# Altium PCB FT2232HL_master.PcbDoc
Units mil, origin at the board's own origin, x right, y up, seen from the top; angles counter-clockwise.
Board outline 3600 x 2500 mil, 2 copper layers (Top Layer, Bottom Layer); 55 components, 57 nets, 221 pads, 59 vias.
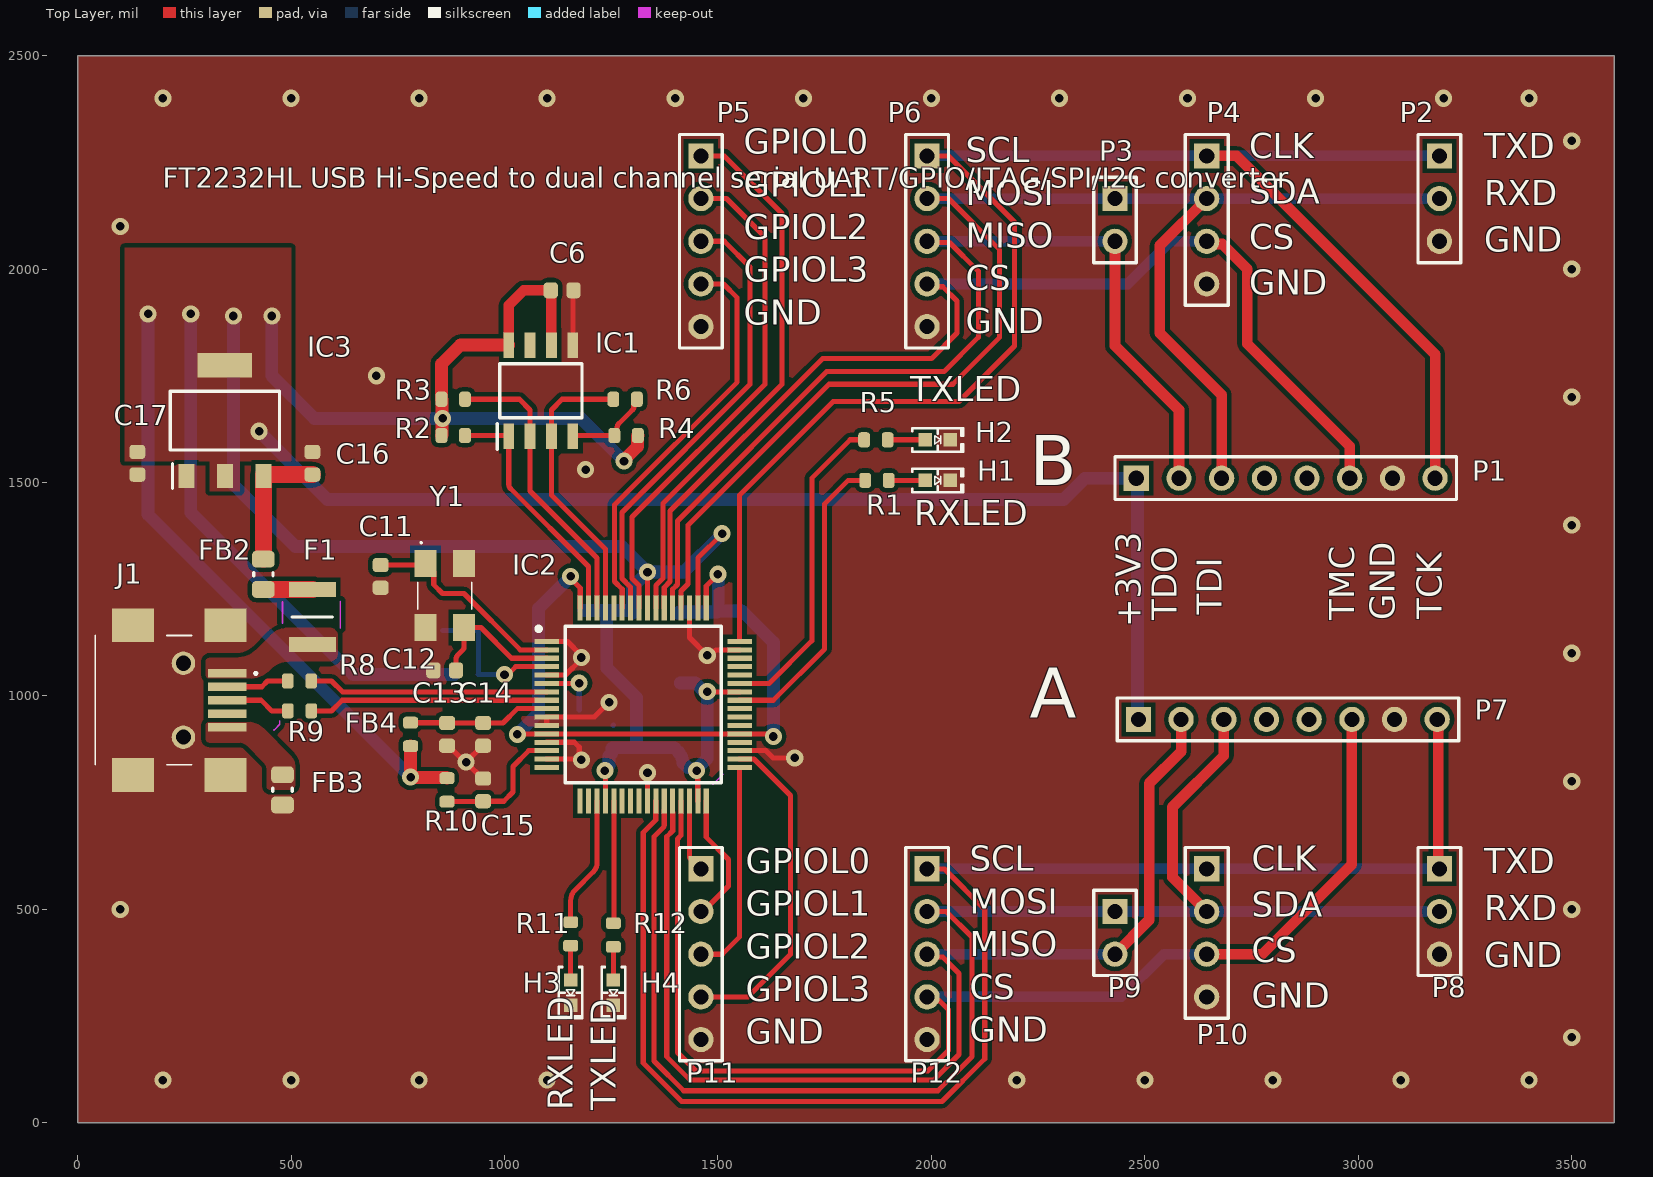
[diagram p0: Top Layer view]
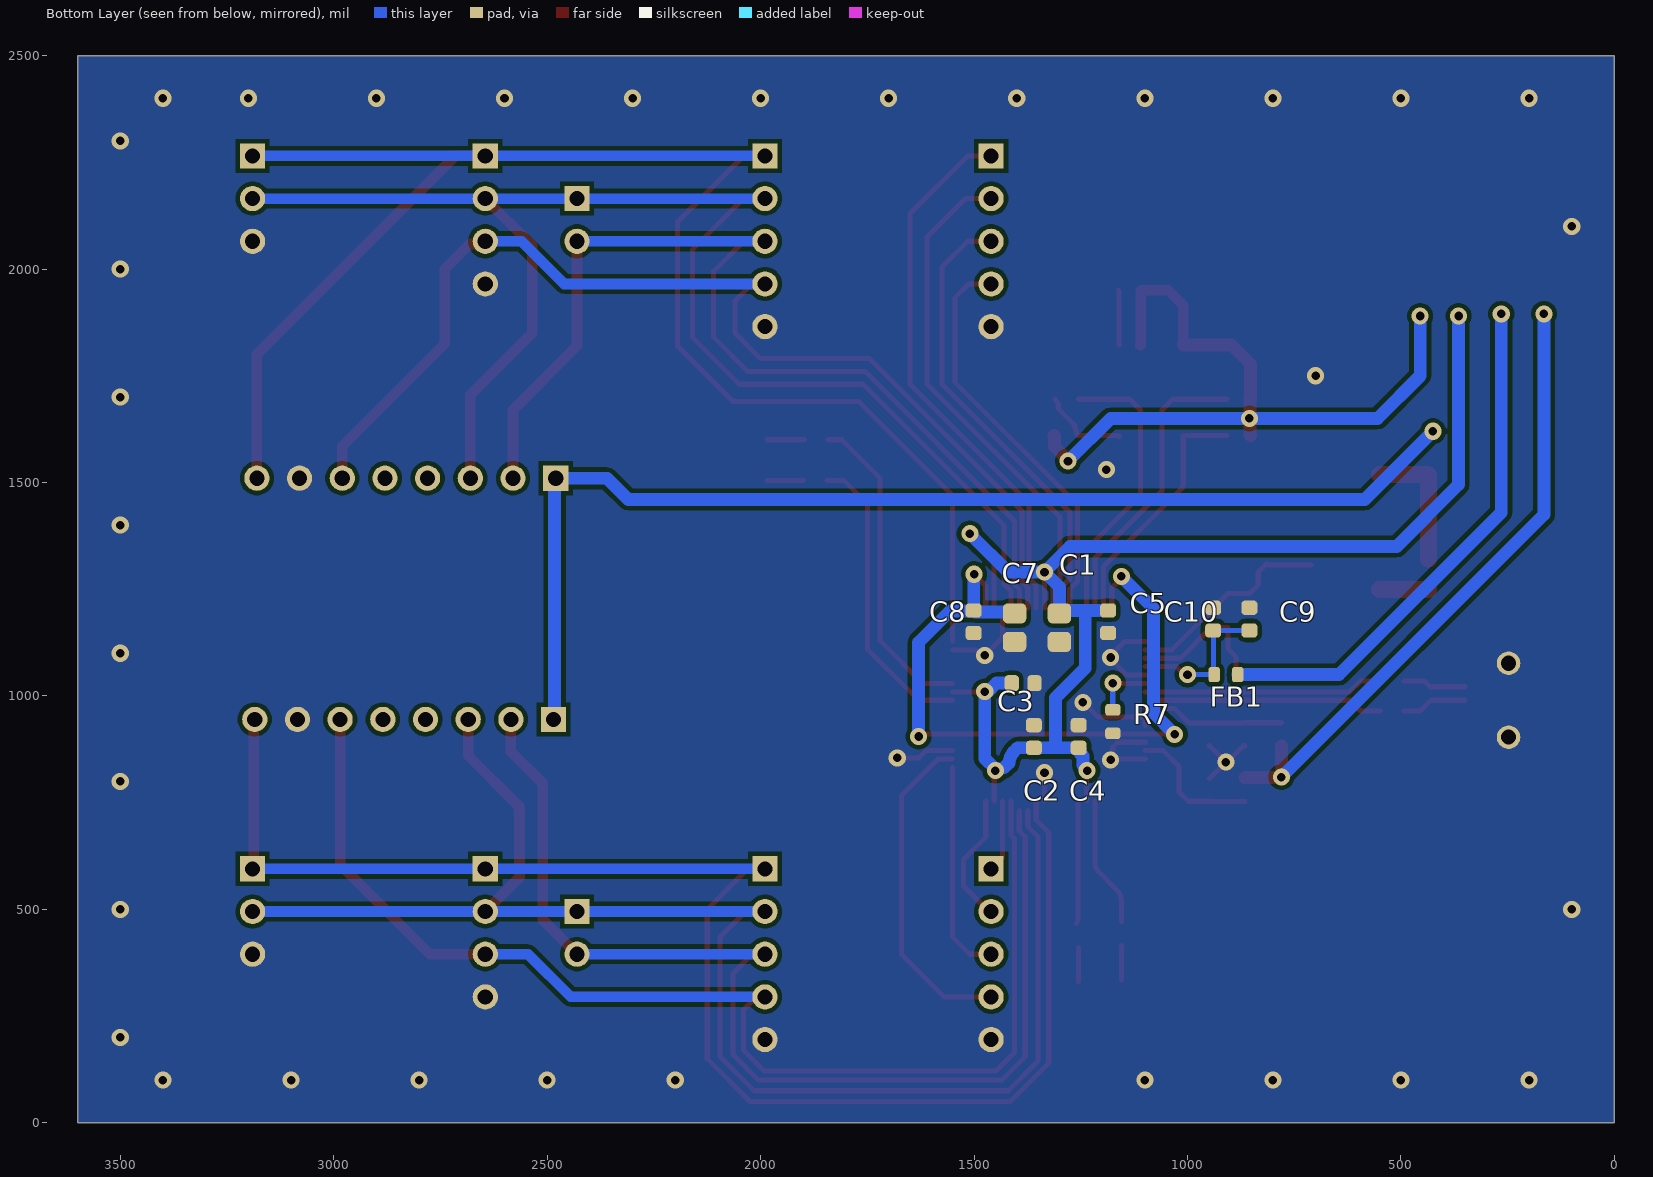
[diagram p1: Bottom Layer view, seen from below]
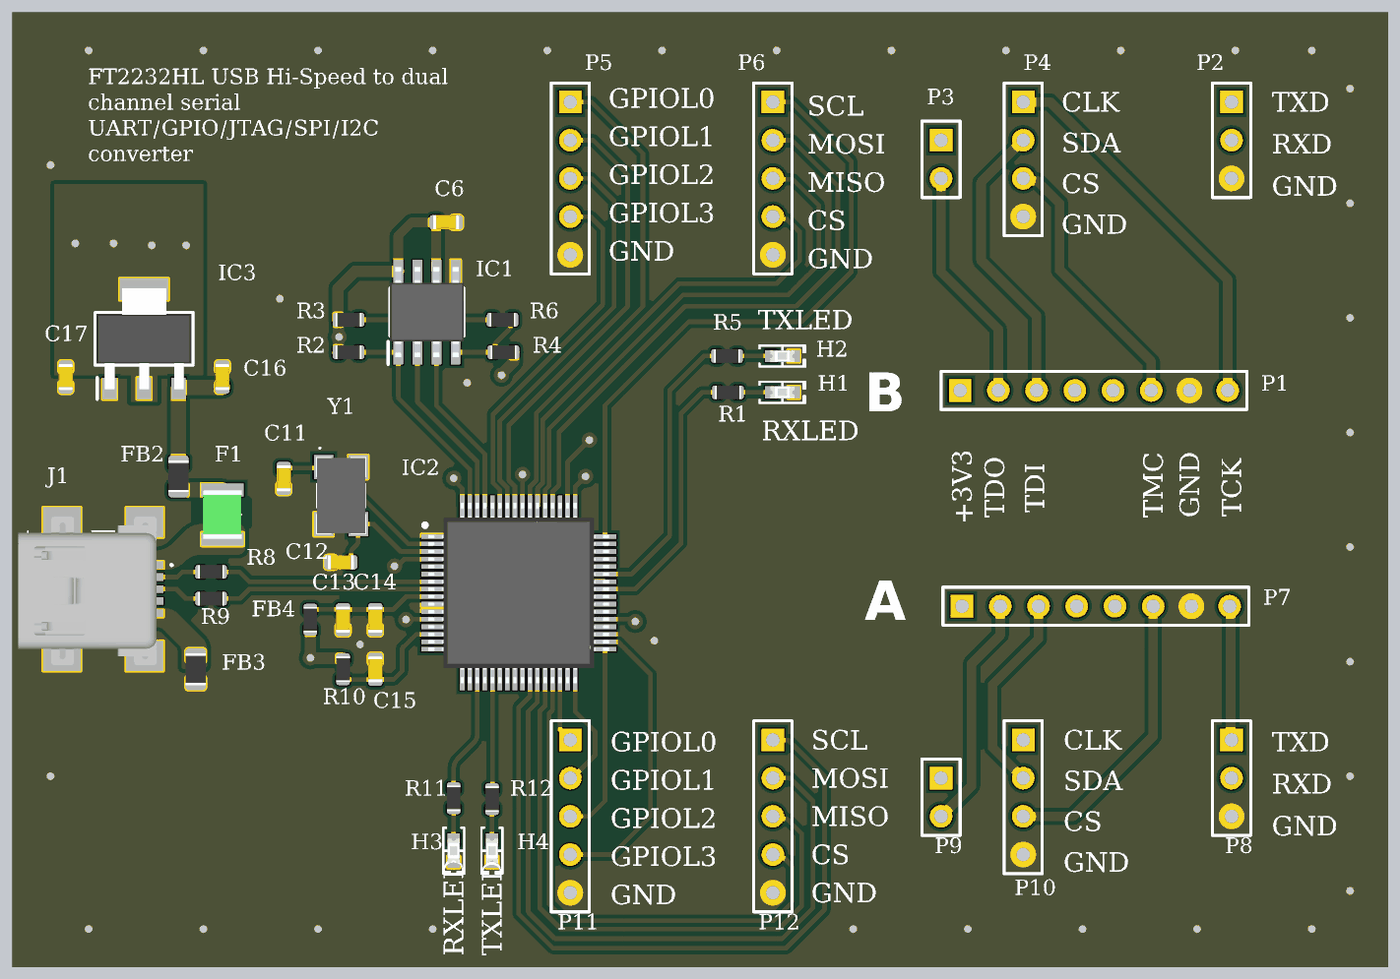
[diagram p2: 3D render of the assembled board from above, using the file's embedded part models]
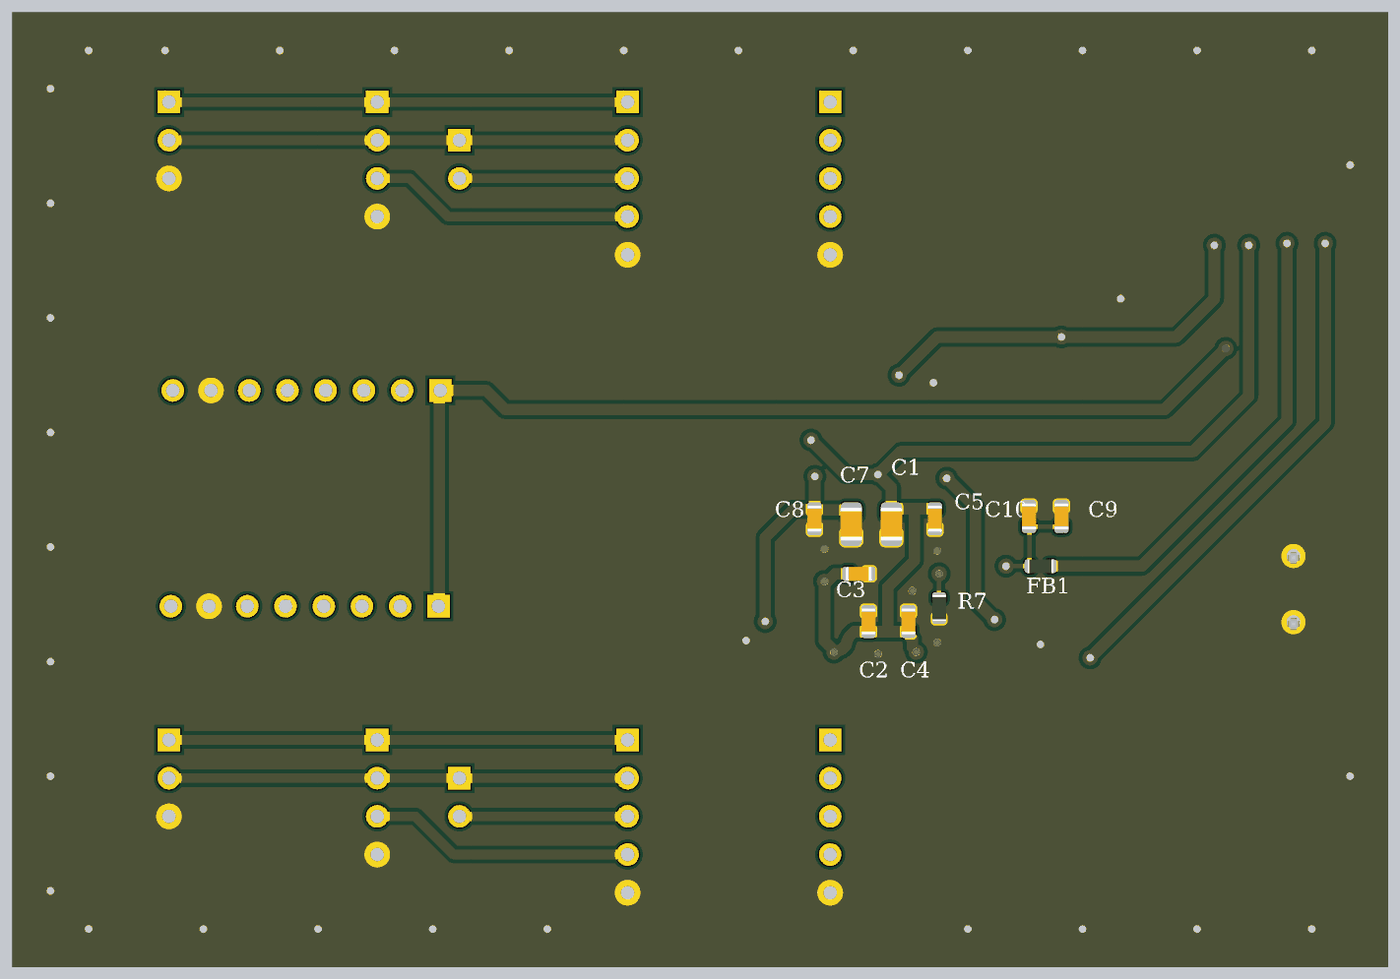
[diagram p3: 3D render of the assembled board from below, using the file's embedded part models]

## Layer stack, top to bottom
Top Solder: solder mask 0.4, Solder Resist, Dk 3.5
Top Layer: signal copper 1.4
Dielectric 1: dielectric 12.6, FR-4, Dk 4.8
Bottom Layer: signal copper 1.4
Bottom Solder: solder mask 0.4, Solder Resist, Dk 3.5

## Board outline
0,0 3600,0 3600,2500 0,2500

## Design rules (kind name [scope] priority, off if disabled: settings)
Clearance [All] p1: gap=10 ignorepadtopadclearanceinfootprint=FALSE except(0: Arc-Hole Track-Hole SMDPad-Hole THPad-Hole Via-Hole Fill-Hole Poly-Hole Region-Hole Text-Hole; 5: Arc-Arc Arc-Track Track-Track; 7: Arc-SMDPad Track-SMDPad SMDPad-SMDPad)
MinimumSolderMaskSliver [All] p1: minsoldermaskwidth=5
PolygonConnect [All] p1: connectstyle=Direct reliefconductorwidth=10 reliefentries=4 polygonreliefangle="90 Angle" airgapwidth=10
RoutingVias [All] p1: holewidth=20 width=40 viastyle="Through Hole" minholewidth=20 minwidth=40 maxholewidth=28 maxwidth=50
SilkToSolderMaskClearance [IsPad] p1: minsilkscreentomaskgap=4 clearancetoexposedcopper=TRUE
SolderMaskExpansion [All] p1: expansion=4 istentingtop=FALSE
Width [All] p1: maxlimit=100 minlimit=10 preferedwidth=20 minimp=50.000000 maximp=50.000000 favimp=50.000000
28 further rules are at their usual default settings.

## Components (designator, comment, footprint, x,y, rotation, side; value= is the part's Value field where it differs from the comment)
C1 "10uF" C_0805 1300,1160 r90 bottom
C2 "0.1uF" C_0603 1360,905 r270 bottom
C3 "0.1uF" C_0603 1385,1030 r0 bottom
C4 "0.1uF" C_0603 1255,905 r270 bottom
C5 "0.1uF" C_0603 1186.14,1173.78 r90 bottom
C6 "0.1uF" C_0603 1135,1950 r180 top
C7 "10uF" C_0805 1405,1160 r90 bottom
C8 "0.1uF" C_0603 1501.14,1173.78 r90 bottom
C9 "4.7uF" C_0603 855,1180 r270 bottom
C10 "0.1uF" C_0603 940,1180 r270 bottom
C11 "18pF" C_0603 710,1280 r90 top
C12 "18pF" C_0603 860,1060 r0 top
C13 "4.7uF" C_0603 865.49,910 r90 top
C14 "0.1uF" C_0603 950,910 r90 top
C15 "0.1uF" C_0603 950,780 r270 top
C16 "4.7uF" C_0603 550,1545 r270 top
C17 "4.7uF" C_0603 140,1545 r90 top
F1 "MF-USHT050KX-2" FUSC3226X85N 550,1185 r90 top
FB1 "600" R_0603 910,1050 r0 bottom
FB2 "600" R_0805 435,1285 r90 top
FB3 "600" R_0805 480,780 r270 top
FB4 "600" R_0603 780,910 r90 top
H1 "LED" "LED 0603_1608 GREEN" 2015,1505 r0 top
H2 "LED" "LED 0603_1608 GREEN" 2015,1600 r0 top
H3 "LED" "LED 0603_1608 GREEN" 1155,305 r270 top
H4 "LED" "LED 0603_1608 GREEN" 1255,305 r270 top
IC1 "93LC56A-I_SN" SOIC127P600X175-8N 1085,1715 r90 top
IC2 "FT2232HL" QFP50P1200X1200X160-64N 1325,980 r0 top locked
IC3 "AMS1117-3.3" SOT229P700X180-4N 345,1645 r90 top
J1 "1734035-2" 17340352 218.5,990 r0 top
P1 "Header 8" HDR1X8 2480,1510 r0 top
P2 "Header 3" HDR1X3 3190,2265 r270 top
P3 "Header 2" HDR1X2 2430,2165 r270 top
P4 "Header 4" HDR1X4 2645,2265 r270 top
P5 "Header 5" HDR1X5 1460,2265 r270 top
P6 "Header 5" HDR1X5 1990,2265 r270 top
P7 "Header 8" HDR1X8 2485,945 r0 top
P8 "Header 3" HDR1X3 3190,595 r270 top
P9 "Header 2" HDR1X2 2430,495 r270 top
P10 "Header 4" HDR1X4 2645,595 r270 top
P11 "Header 5" HDR1X5 1460,595 r270 top
P12 "Header 5" HDR1X5 1990,595 r270 top
R1 "1k" R_0603 1872.44,1505 r0 top
R2 "10k" R_0603 880,1610 r180 top
R3 "10k" R_0603 880,1695 r180 top
R4 "10k" R_0603 1285,1610 r0 top
R5 "1k" R_0603 1870,1600 r0 top
R6 "2.2k" R_0603 1282.56,1695 r180 top
R7 "12k" R_0603 1175,940 r90 bottom
R8 "10" R_0603 520,1035 r0 top
R9 "10" R_0603 520,965 r0 top
R10 "10k" R_0603 865.49,780 r90 top
R11 "1k" R_0603 1155,442.44 r270 top
R12 "1k" R_0603 1255,440 r270 top
Y1 "ABM3C-12.000MHZ-D4Y-T" ABM3C10000MHZD4YT 860,1235 r270 top

## Footprints (in the part's own frame and the unit in brackets; to place one, negate y for a bottom-side part, rotate by r counter-clockwise, add the part's x,y. Pads: shape width x height; smd on the part's side, far side on the other; paste and mask are expansions set on the pad)
17340352 [mm]
  rect 2.3x0.5 smd: 1(3.35,1.6) 2(3.35,0.8) 3(3.35,0) 4(3.35,-0.8) 5(3.35,-1.6)
  round 1.4 hole 0.9: MH1(0.75,2.2) MH2(0.75,-2.2)
  rect 2.5x2 smd: MP1(-2.25,4.45) MP2(3.25,4.45) MP3(3.25,-4.45) MP4(-2.25,-4.45)
  silkscreen extent -4.5,-3.85 5.1,3.85, body extent -5.15,-5.07 4.05,4.83, height 4.2
ABM3C10000MHZD4YT [mm]
  rect 1.6x1.3 smd: 1(-1.9,-1.15) 2(1.9,-1.15) 3(1.9,1.15) 4(-1.9,1.15)
  silkscreen extent -3.2,-1.6 0.8,1.6, body extent -2.57,-1.67 2.57,1.67, height 1.4
C_0603 [mm] "Chip Capacitor, 2-Leads, Body 1.60x0.80mm, IPC Medium Density"
  rrect50% 0.85x0.95 smd: 1(-0.675,0) 2(0.675,0)
  body extent -0.87,-0.48 0.87,0.48, height 0.9
C_0805 [mm] "Chip Capacitor, 2-Leads, Body 2.00x1.25mm, IPC Medium Density"
  rrect50% 1.2x1.4 smd: 1(-0.85,0) 2(0.85,0)
  body extent -1.1,-0.72 1.1,0.72, height 1.45
FUSC3226X85N [mm]
  rect 0.88x2.81 smd: 1(-1.635,0) 2(1.635,0)
  silkscreen extent 0,-1.19 0,1.19, body extent -1.61,-1.29 1.61,1.29, height 0.85
HDR1X2 [mm] "Connector; Header; 2 Position"
  rect 1.5x1.5 hole 0.9: 1(0,0)
  round 1.5 hole 0.9: 2(2.54,0)
  silkscreen extent -1.27,-1.27 3.81,1.27
HDR1X3 [mm] "Connector; Header; 3 Position"
  rect 1.5x1.5 hole 0.9: 1(0,0)
  round 1.5 hole 0.9: 2(2.54,0) 3(5.08,0)
  silkscreen extent -1.27,-1.27 6.35,1.27
HDR1X4 [mm] "Connector; Header; 4 Position"
  rect 1.5x1.5 hole 0.9: 1(0,0)
  round 1.5 hole 0.9: 2(2.54,0) 3(5.08,0) 4(7.62,0)
  silkscreen extent -1.27,-1.27 8.89,1.27
HDR1X5 [mm] "Connector; Header; 5 Position"
  rect 1.5x1.5 hole 0.9: 1(0,0)
  round 1.5 hole 0.9: 2(2.54,0) 3(5.08,0) 4(7.62,0) 5(10.16,0)
  silkscreen extent -1.27,-1.27 11.43,1.27
HDR1X8 [mm] "Connector; Header; 8 Position"
  rect 1.5x1.5 hole 0.9: 1(0,0)
  round 1.5 hole 0.9: 2(2.54,0) 3(5.08,0) 4(7.62,0) 5(10.16,0) 6(12.7,0) 7(15.24,0) 8(17.78,0)
  silkscreen extent -1.27,-1.27 19.05,1.27
"LED 0603_1608 GREEN" [mm] "Chip Diode, 2-Leads, Body 1.60x0.80mm, IPC Medium Density"
  rect 0.8x0.8 smd: 1(-0.75,0) 2(0.75,0)
  silkscreen extent -1.52,-0.7 1.52,0.7, body extent -0.8,-0.4 0.8,0.4, height 0.53
QFP50P1200X1200X160-64N [mm]
  rect 1.475x0.3 smd: 1(-5.738,3.75) 2(-5.738,3.25) 3(-5.738,2.75) 4(-5.738,2.25) 5(-5.738,1.75) 6(-5.738,1.25) 7(-5.738,0.75) 8(-5.738,0.25) 9(-5.738,-0.25) 10(-5.738,-0.75) 11(-5.738,-1.25) 12(-5.738,-1.75) 13(-5.738,-2.25) 14(-5.738,-2.75) 15(-5.738,-3.25) 16(-5.738,-3.75) 33(5.738,-3.75) 34(5.738,-3.25) 35(5.738,-2.75) 36(5.738,-2.25) 37(5.738,-1.75) 38(5.738,-1.25) 39(5.738,-0.75) 40(5.738,-0.25) 41(5.738,0.25) 42(5.738,0.75) 43(5.738,1.25) 44(5.738,1.75) 45(5.738,2.25) 46(5.738,2.75) 47(5.738,3.25) 48(5.738,3.75)
  rect 0.3x1.475 smd: 17(-3.75,-5.738) 18(-3.25,-5.738) 19(-2.75,-5.738) 20(-2.25,-5.738) 21(-1.75,-5.738) 22(-1.25,-5.738) 23(-0.75,-5.738) 24(-0.25,-5.738) 25(0.25,-5.738) 26(0.75,-5.738) 27(1.25,-5.738) 28(1.75,-5.738) 29(2.25,-5.738) 30(2.75,-5.738) 31(3.25,-5.738) 32(3.75,-5.738) 49(3.75,5.738) 50(3.25,5.738) 51(2.75,5.738) 52(2.25,5.738) 53(1.75,5.738) 54(1.25,5.738) 55(0.75,5.738) 56(0.25,5.738) 57(-0.25,5.738) 58(-0.75,5.738) 59(-1.25,5.738) 60(-1.75,5.738) 61(-2.25,5.738) 62(-2.75,5.738) 63(-3.25,5.738) 64(-3.75,5.738)
  silkscreen extent -6.35,-4.65 4.65,4.65, body extent -6,-6 6,6, height 1.6
R_0603 [mm] "Chip Resistor, 2-Leads, Body 1.60x0.80mm, IPC Medium Density"
  rrect50% 0.7x0.9 smd: 1(-0.7,0) 2(0.7,0)
  body extent -0.85,-0.45 0.85,0.45, height 0.55
R_0805 [mm] "Chip Resistor, 2-Leads, Body 2.00x1.25mm, IPC Medium Density"
  rrect50% 1x1.35 smd: 1(-0.9,0) 2(0.9,0)
  silkscreen extent -0.1,-0.58 0.1,0.58, body extent -1.05,-0.67 1.05,0.67, height 0.6
SOIC127P600X175-8N [mm]
  rect 1.525x0.65 smd: 1(-2.712,1.905) 2(-2.712,0.635) 3(-2.712,-0.635) 4(-2.712,-1.905) 5(2.712,-1.905) 6(2.712,-0.635) 7(2.712,0.635) 8(2.712,1.905)
  silkscreen extent -3.47,-2.45 1.6,2.58, body extent -3,-2.45 3,2.45, height 1.75
SOT229P700X180-4N [mm]
  rect 1.45x0.95 smd: 1(-3.3,2.29) 2(-3.3,0) 3(-3.3,-2.29)
  rect 1.45x3.25 smd: 4(3.3,0)
  silkscreen extent -4.03,-3.25 1.75,3.25, body extent -3.35,-3.15 3.35,3.15, height 1.8

## Part data
C1 C2 C3 C4 C5 C6 C7 C8 C9 C10 C11 C12 C13 C14 C15 C16 C17: library part C
F1: "Fuse", Manufacturer_Name=Bourns, Mouser Part Number=652-MF-USHT050KX-2, Arrow Part Number=MF-USHT050KX-2, Arrow Price/Stock=https://www.arrow.com/en/products/mf-usht050kx-2/bourns?region=nac, Datasheet Link=https://www.bourns.com/docs/product-datasheets/mfusht.pdf, Height=0.85mm, Manufacturer_Part_Number=MF-USHT050KX-2, Mouser Price/Stock=https://www.mouser.co.uk/ProductDetail/Bourns/MF-USHT050KX-2?qs=5aG0NVq1C4wyuZxBpUOWmw%3D%3D
FB1 FB2 FB3 FB4: library part FB, "Ferrite Bead"
IC1: "Integrated Circuit", Arrow Part Number=93LC56A-I/SN, Manufacturer_Name=Microchip, Mouser Part Number=579-93LC56A-I/SN, Arrow Price/Stock=https://www.arrow.com/en/products/93lc56a-isn/microchip-technology?region=nac, Datasheet Link=https://ww1.microchip.com/downloads/en/DeviceDoc/21794G.pdf, Height=1.75mm, Manufacturer_Part_Number=93LC56A-I/SN, Mouser Price/Stock=https://www.mouser.co.uk/ProductDetail/Microchip-Technology-Atmel/93LC56A-I-SN?qs=sX%2FisSQq3c4s3olCwy%2F09Q%3D%3D
IC2: "Integrated Circuit", Manufacturer_Name="FTDI Chip", Height=1.6mm, Manufacturer_Part_Number=FT2232HL
IC3: "LDO 3.3V", Manufacturer_Name=Advanced, Datasheet Link=https://datasheet.datasheetarchive.com/originals/distributors/Datasheets-28/DSA-550594.pdf, Height=1.8mm, Manufacturer_Part_Number=AMS1117-3.3
J1: "Connector", Manufacturer_Name="TE Connectivity", Mouser Part Number=571-1734035-2, Arrow Part Number=1734035-2, Arrow Price/Stock=https://www.arrow.com/en/products/1734035-2/te-connectivity?region=nac, Datasheet Link=https://www.te.com/commerce/DocumentDelivery/DDEController?Action=srchrtrv&DocNm=1-1773453-6&DocType=Data+Sheet&DocLang=English&PartCntxt=1734035-2&DocFormat=pdf, Height=3.95mm, Manufacturer_Part_Number=1734035-2, Mouser Price/Stock=https://www.mouser.co.uk/ProductDetail/TE-Connectivity/1734035-2?qs=Lu3apKW7jUhaCoyjqYNFIA%3D%3D
P1 P7: "Header, 8-Pin", LatestRevisionDate=17-Jul-2002, LatestRevisionNote="Re-released for DXP Platform.", Publisher="Altium Limited"
P2 P8: "Header, 3-Pin", LatestRevisionDate=17-Jul-2002, LatestRevisionNote="Re-released for DXP Platform.", Publisher="Altium Limited"
P3 P9: "Header, 2-Pin", LatestRevisionDate=17-Jul-2002, LatestRevisionNote="Re-released for DXP Platform.", Publisher="Altium Limited"
P4 P10: "Header, 4-Pin", LatestRevisionDate=17-Jul-2002, LatestRevisionNote="Re-released for DXP Platform.", Publisher="Altium Limited"
P5 P6 P11 P12: "Header, 5-Pin", LatestRevisionDate=17-Jul-2002, LatestRevisionNote="Re-released for DXP Platform.", Publisher="Altium Limited"
R1 R2 R3 R4 R5 R6 R7 R8 R9 R10 R11 R12: library part R
Y1: library part ABM3C-10.000MHZ-D4Y-T, "Crystal or Oscillator", Manufacturer_Name=ABRACON, Mouser Part Number=815-ABM3C-10-D4YT, Arrow Part Number=ABM3C-10.000MHZ-D4Y-T, Arrow Price/Stock=https://www.arrow.com/en/products/abm3c-10.000mhz-d4y-t/abracon, Datasheet Link=https://www.mouser.com/datasheet/2/3/abm3c-1775120.pdf, Height=1.3mm, Manufacturer_Part_Number=ABM3C-10.000MHZ-D4Y-T, Mouser Price/Stock=https://www.mouser.co.uk/ProductDetail/ABRACON/ABM3C-10000MHZ-D4Y-T?qs=hxOQwdLlgeqTP8bcyrKgbg%3D%3D

## Via types
v1: diameter 40, hole 20, Top Layer to Bottom Layer, tented both sides, 59 vias

## Nets (pads, with @x,y where several pads share a name; then routed paths per layer and width w, separated by ;. In a path a pad name is that pad's centre, name@x,y a point inside that pad or via, vN(x,y) a via of type N, cw(c..) or ccw(c..) an arc to the next point about the centre after c; other vN are vias at no path point)
+1V8: C7.2 C8.2 IC2.12 IC2.37 IC2.49 IC2.64 | length 1762.7
  Top Layer w12: v1(1030,910) 1031.01,911.01 1099,911.01 IC2.12 IC2.37 1616.32,911.1 1622.42,905 v1(1630,905) ; v1(1155,1280) 1155,1275.3 1177.36,1252.94 IC2.64 ; IC2.49 1472.64,1257.64 v1(1500,1285)
  Bottom Layer w30: v1(1030,910) 1080,960 1080,1205 v1(1155,1280) ; C7.2 1408.44,1196.91 1497.7,1196.91 C8.2 ; v1(1500,1285) 1500.57,1284.43 1500.57,1200.93 C8.2 ; v1(1630,905) 1630,1125 1556.38,1198.62 1502.87,1198.62 C8.2
+3V3: C1.2 C2.2 C3.2 C4.2 C5.2 C6.2 C17.2 FB1.1 FB4.1 IC1.6 IC1.8 IC2.20 IC2.31 IC2.42 IC2.50 IC2.56 IC3.2 IC3.4 P1.1 P7.1 R2.2 R3.2 R4.2 R10.2 | length 10539.1
  Top Layer w12: v1(1235,825) 1236.32,823.68 1236.32,754.19 IC2.20 ; IC2.56 1334.92,1205.98 1334.92,1289.92 v1(1335,1290) ; v1(1450,825) 1452.86,822.14 1452.86,754.19 IC2.31 ; IC2.50 1452.95,1322.95 v1(1510,1380) ; v1(1475,1010) 1475.38,1009.62 1550.81,1009.62 IC2.42
  Top Layer w25: IC1.8 1010,1915 1045,1950 C6.2 1109.21,1949.21 1109.21,1822.56 IC1.6
  Top Layer w30: FB4.1 v1(780,810) 781.22,808.78 864.27,808.78 R10.2 ; R2.2 853.66,1611.22 853.66,1648.66 v1(855,1650) 853.66,1651.34 853.66,1693.78 R3.2 852.44,1777.44 896.77,1821.77 IC1.8 ; v1(1280,1550) 1280,1552.71 1311.34,1584.04 1311.34,1608.78 R4.2 ; P1.1 P1.1@2482.5,1507.5 ; P7.1@2482.5,947.5 P7.1
  Bottom Layer w30: v1(165,1895) 165,1425 v1(780,810) ; v1(265,1895) 265,1430 645,1050 FB1.1 ; v1(365,1890) 365,1495 510,1350 1275,1350 v1(1335,1290) ; v1(425,1620) 585,1460 2310,1460 2360,1510 P1.1 ; v1(455,1890) 455,1750 555,1650 v1(855,1650) 1180,1650 v1(1280,1550) ; C5.2 1239.63,1200.35 ; v1(1235,825) 1235,827.71 1245,837.71 1245,859.12 1251.3,865.42 1251.3,876.69 C4.2@1253.03,878.43 ; C4.2 1309.35,878.43 ; C3.2 1447.42,1030 1467.42,1010 v1(1475,1010) 1475,853.74 1450,828.74 v1(1450,825) 1429.62,832.07 1424.75,836.94 1418.5,843.19 ccw(c1364.21,835.52) 1408.67,867.6 1406.63,869.64 1397.84,878.43 1363.7,878.43 C2.2 1309.35,878.43 ; v1@1508.09,1378.09 1420,1290 v1(1335,1290) ; P7.1@2482.5,947.5 P1.1@2482.5,1507.5 ; 1239.63,1200.35 1293.11,1200.35 C1.2 1300,1255 v1(1335,1290) ; 1239.63,1200.35 1239.63,1065.37 1309.35,995.65 1309.35,878.43
+5: C16.2 FB2.2 IC3.3 | length 312.3
  Top Layer w40: FB2.2 435.08,1320.51 IC3.3@435.08,1515 ; IC3.3 IC3.3@435.08,1515 ; C16.2 436.46,1518.43 435.08,1517.05 IC3.3@435.08,1515
A0: IC2.26 P7.8 P8.1 P10.1 P12.1 | length 3581.4
  Top Layer w12: IC2.26 1354.43,754 1354.43,709.43 1325,680 1325,140 1415,50 2025,50 2125,150 2125,500 2030.5,594.5 1990.5,594.5 P12.1
  Top Layer w25: P7.8 3187.5,942.5 3187.5,597.5 P8.1
  Bottom Layer w25: P12.1 P10.1 P8.1
A1: IC2.27 P7.3 P8.2 P9.1 P10.2 P12.2 | length 3545.9
  Top Layer w12: IC2.27@1374.15,731.06 1374.15,697.8 1374.06,697.71 1374.06,694.06 1350,670 1350,145 1420,75 2015,75 2095,155 2095,435 2035,495 P12.2
  Top Layer w25: P10.2 2565,575 2565,740 2685,860 P7.3
  Bottom Layer w25: P12.2 P9.1 P10.2 P8.2
A2: IC2.28 P7.2 P9.2 P12.3 | length 2652.4
  Top Layer w12: IC2.28@1393.99,731.06 1393.99,727.41 1394.08,727.32 1394.08,684.08 1393.39,683.39 1380,670 1380,155 1435,100 2005,100 2065,160 2065,350 2026.61,388.39 1996.61,388.39 P12.3
  Top Layer w25: P9.2 2510,475 2510,795 2585,870 P7.2
  Bottom Layer w25: P12.3 P9.2
A3: IC2.29 P7.6 P10.3 P12.4 | length 2886.6
  Top Layer w12: IC2.29 1413.58,673.58 1405,665 1405,165 1448.5,121.5 1991.5,121.5 2040,170 2040,265 2019,286 1999,286 P12.4
  Top Layer w25: P10.3 2775,395 2985,605 P7.6
  Bottom Layer w25: P12.4 2445,295 2545,395 P10.3
A4: IC2.30 P11.1 | length 170.2
  Top Layer w12: IC2.30 1433.27,621.73 P11.1
A5: IC2.32 P11.2 | length 310.6
  Top Layer w12: P11.2 1465,495 1525,555 1525,616.85 1472.64,669.21 IC2.32
A6: IC2.33 P11.3 | length 504.3
  Top Layer w12: P11.3 1510,395 1550.91,435.91 IC2.33
A7: IC2.34 P11.4 | length 777.5
  Top Layer w12: P11.4 1570,295 1670,395 1670,766.59 1584.64,851.95 1551,851.95 IC2.34
A8: IC2.16
A9: IC2.17
A10: IC2.18
A11: IC2.19 R11.1 | length 306.9
  Top Layer w12: R11.1 1155,520.7 ; 1155,520.75 cw(c1189.41,520.75) 1165,545 1207.98,587.98 ccw(c1186.63,609.2) 1216.73,609.2 1216.73,609.27 IC2.19
A12: IC2.21 R12.1 | length 287.6
  Top Layer w12: IC2.21 1256.1,474.45 R12.1@1260,467.56
A13: IC2.22
A14: IC2.23
A15: IC2.24
B0: IC2.48 P1.8 P2.1 P4.1 P6.1 | length 3908.8
  Top Layer w12: IC2.48 1550.91,1470.91 1770,1690 2065,1690 2195,1820 2195,2110 2040,2265 P6.1
  Top Layer w25: P4.1 2715,2265 3180,1800 P1.8
  Bottom Layer w25: P6.1 P4.1 P2.1
B1: IC2.52 P1.3 P2.2 P3.1 P4.2 P6.2 | length 3498.5
  Top Layer w12: IC2.52 1413.68,1206 1413.68,1245.64 1430,1261.96 1430,1400 1760,1730 2050,1730 2160,1840 2160,2045 2040,2165 P6.2
  Top Layer w25: P4.2 2535,2055 2535,1850 2680,1705 P1.3
  Bottom Layer w25: P6.2 P3.1 P4.2 P2.2
B2: IC2.53 P1.2 P3.2 P6.3 | length 2452.9
  Top Layer w12: IC2.53 1393.9,1249.9 1405,1261.01 1405,1410 1755,1760 2030,1760 2110,1840 2110,1995 2042.53,2062.47 1992.53,2062.47 P6.3
  Top Layer w25: P3.2 2430,1820 2580,1670 P1.2
  Bottom Layer w25: P6.3 P3.2
B3: IC2.54 P1.6 P4.3 P6.4 | length 2646.9
  Top Layer w12: IC2.54 1374.21,1254.26 1388,1268.05 1388,1433 1745,1790 2000,1790 2060,1850 2060,1925 2026.61,1958.39 1996.61,1958.39 P6.4
  Top Layer w25: P4.3 2651.52,2058.48 2681.52,2058.48 2740,2000 2740,1825 2980,1585 P1.6
  Bottom Layer w25: P6.4 2460,1965 2560,2065 P4.3
B4: IC2.55 P5.1 | length 1292.4
  Top Layer w12: IC2.55 1354.53,1258.62 1371,1275.09 1371,1451 1650,1730 1650,2130 1515,2265 P5.1
B5: IC2.57 P5.2 | length 1191.9
  Top Layer w12: IC2.57 1315.16,1258.85 1299,1275.01 1299,1419 1610,1730 1610,2075 1520,2165 P5.2
B6: IC2.58 P5.3 | length 1071.7
  Top Layer w12: IC2.58 1295.47,1254.49 1275,1274.96 1275,1430 1575,1730 1575,2005 1515,2065 P5.3
B7: IC2.59 P5.4 | length 951.6
  Top Layer w12: IC2.59 1275.79,1250.13 1258,1267.92 1258,1448 1545,1735 1545,1932.97 1513.03,1964.94 1460.06,1964.94 P5.4
B8: IC2.38
B9: IC2.39
B10: IC2.40
B11: IC2.41 R1.1 | length 706.5
  Top Layer w12: IC2.41 1629.84,989.84 1750,1110 1750,1450 1805,1505 R1.1
B12: IC2.43 R5.1 | length 751
  Top Layer w12: IC2.43 1620,1029.21 1720,1129.21 1720,1510 1810,1600 R5.1
B13: IC2.44
B14: IC2.45
B15: IC2.46
GND: C1.1 C2.1 C3.1 C4.1 C5.1 C6.1 C7.1 C8.1 C9.1 C10.1 C11.1 C12.1 C13.1 C14.1 C15.1 C16.1 C17.1 FB3.2 H1.2 H2.2 H3.2 H4.2 IC1.5 IC2.1 IC2.5 IC2.10 IC2.11 IC2.13 IC2.15 IC2.25 IC2.35 IC2.47 IC2.51 IC3.1 J1.MH1 J1.MH2 J1.MP1 J1.MP2 J1.MP3 J1.MP4 P1.7 P2.3 P4.4 P5.5 P6.5 P7.7 P8.3 P10.4 P11.5 P12.5 R7.1 Y1.2 Y1.4 | length 1285.3
  Top Layer w12: C13.1 868.74,883.43 907.17,845 v1(910,845) ; C15.1 948.23,806.57 910,844.8 v1(910,845) ; C14.1 948.23,883.43 910,845.2 v1(910,845) ; IC2.15 1099.19,851.95 v1@1178.05,851.95 ; IC2.13 1163.58,891.42 1175,880 1175,855 v1@1178.05,851.95 ; IC2.11 IC2.10 1210.47,950.47 v1(1245,985) ; IC2.5 1142.99,1048.9 1180,1085.91 1180,1095 1147.46,1127.54 1099.19,1127.54 IC2.1 ; IC1.5 1160.79,1822.56 1160.79,1949.21 C6.1 ; v1(1180,850) v1@1178.05,851.95 ; IC2.25 1334.92,754.17 1334.92,819.92 v1(1335,820) ; IC2.51 1433.27,1136.73 v1(1475,1095) 1482.58,1095 1495.53,1107.95 IC2.47 ; IC2.35 1612.36,871.73 1629.09,855 v1(1680,855)
  Bottom Layer w12: C4.1@1254.21,930.79 C4.1
  other v1: 200,100 500,100 800,100 1100,100 2200,100 2500,100 2800,100 3100,100 3400,100 3500,200 100,500 3500,500 3500,800 1180,1090 3500,1100 3500,1400 1190,1530 3500,1700 700,1750 3500,2000 100,2100 3500,2300 200,2400 500,2400 800,2400 1100,2400 1400,2400 1700,2400 2000,2400 2300,2400 2600,2400 2900,2400 3200,2400 3400,2400
NetC9_2: C9.2 C10.2 FB1.2 IC2.4 | length 358.7
  Top Layer w12: v1(1000,1050) 1007.58,1050 1026.16,1068.58 IC2.4
  Bottom Layer w12: C9.2 C10.2 938.78,1152.2 938.78,1051.22 FB1.2 v1(1000,1050)
NetC11_2: C11.2 IC2.2 Y1.1 | length 491.3
  Top Layer w12: C11.2 811.5,1306.57 Y1.1 834.32,1290.21 834.32,1260.68 855,1240 905,1240 1037.05,1107.95 IC2.2
NetC12_2: C12.2 IC2.3 Y1.3 | length 330.5
  Top Layer w12: C12.2 886.57,1086.6 cw(c898.57,1086.6) 890.07,1095.07 901.78,1106.78 ccw(c893.28,1115.25) 905.28,1115.25 Y1.3 944.8,1160.2 1016.73,1088.27 IC2.3
NetC13_2: C13.2 C14.2 FB4.2 IC2.9 | length 333.4
  Top Layer w12: FB4.2 780.49,937.07 865,937.07 C13.2 C14.2 996.57,936.57 1030.16,970.16 IC2.9
NetC15_2: C15.2 IC2.14 R10.1 | length 318.2
  Top Layer w12: R10.1 865.98,752.93 949.51,752.93 C15.2 998.43,753.43 1020,775 1020,835 1056.73,871.73 IC2.14
NetF1_1: F1.1 J1.1
NetF1_2: F1.2 FB2.1 | length 115.1
  Top Layer w40: FB2.1 435.1,1249.47 549.9,1249.47 F1.2
NetFB3_1: FB3.1 J1.5
NetH1_1: H1.1 R1.2 | length 85.5
  Top Layer w12: R1.2 H1.1
NetH2_1: H2.1 R5.2 | length 87.9
  Top Layer w12: R5.2 H2.1
NetH3_1: H3.1 R11.2 | length 80.4
  Top Layer w12: H3.1 R11.2
NetH4_1: H4.1 R12.2 | length 80.4
  Top Layer w12: H4.1@1255,329.68 R12.2@1255,410.04
NetIC1_1: IC1.1 IC2.63 R2.1 | length 582.5
  Top Layer w12: R2.1 1008.23,1610 IC1.1 1010,1494.97 ccw(c1022,1494.97) 1013.51,1486.49 1197.05,1302.95 IC2.63
NetIC1_2: IC1.2 IC2.62 R3.1 | length 691.8
  Top Layer w12: R3.1 1035,1695 1060,1670 IC1.2 1060,1480 1216.73,1323.27 IC2.62
NetIC1_3: IC1.3 IC2.61 R6.2 | length 671.8
  Top Layer w12: IC2.61 1236.42,1343.58 1110,1470 IC1.3 1110,1670 1135,1695 R6.2
NetIC1_4: IC1.4 R4.1 R6.1 | length 201.6
  Top Layer w12: IC1.4 1161.77,1610 R4.1 1260.83,1620.83 1264.51,1632.6 cw(c1275.95,1628.98) 1267.45,1637.45 1299.4,1669.4 ccw(c1290.89,1677.86) 1302.89,1677.86 1302.89,1682.8 cw(c1314.89,1682.8) 1303.23,1685.64 R6.1
NetIC2_6: IC2.6 R7.2 | length 138.7
  Top Layer w12: IC2.6 1099.19,1029.31 1174.31,1029.31 v1(1175,1030)
  Bottom Layer w12: R7.2 v1(1175,1030)
NetIC2_7: IC2.7 R8.2 | length 562.1
  Top Layer w12: R8.2 595,1035 620.47,1009.53 IC2.7
NetIC2_8: IC2.8 R9.2 | length 538.8
  Top Layer w12: R9.2 595,965 619.84,989.84 IC2.8@1076.06,989.84
NetJ1_2: J1.2 R8.1 | length 147.6
  Top Layer w12: J1.2 431.5,1021.5 445,1035 R8.1
NetJ1_3: J1.3 R9.1 | length 152.4
  Top Layer w12: J1.3 430,990 455,965 R9.1
pads on no net: IC1.7 IC2.36 IC2.60 J1.4 P1.4 P1.5 P7.4 P7.5

## Polygon pours and split planes (outlines as drawn)
GND on Top Layer (solid, remove dead copper, pour order 11): 0,0 3600,0 3600,2500 0,2500
NetFB3_1 on Top Layer "NETFB3_1_L01_P001" (solid, remove dead copper, pour order 1): 443.04,786.96 443.04,826.1 ccw(c416.82,826.1) 435.36,844.64 397.07,882.93 ccw(c380,865.86) 380,890 310,890 cw(c310,900) 300,900 300,930 cw(c310,930) 310,940 395.86,940 cw(c395.86,881.72) 437.07,922.93 496.3,863.7 cw(c463.23,830.63) 510,830.63 510,792.42 cw(c497.58,792.42) 497.57,780 450,780 cw(c450,786.96)
NetF1_1 on Top Layer "NETF1_1_L01_P008" (solid, remove dead copper, pour order 8): 310,1040 397.57,1040 ccw(c397.57,1118.28) 452.93,1062.93 cw(c494.14,1021.72) 494.14,1080 590,1080 ccw(c590,1100) 610,1100 610,1140 ccw(c590,1140) 590,1160 494.14,1160 ccw(c494.14,1101.73) 452.93,1142.93 420.39,1110.39 cw(c371.16,1159.62) 371.16,1090 310,1090 ccw(c310,1080) 300,1080 300,1050 ccw(c310,1050)
+3V3 on Top Layer (solid, remove dead copper, pour order 9): 310,1480 380,1480 380,1550 500,1550 500,2050 110,2050 110,1550 310,1550
GND on Bottom Layer "GND_L02_P004" (solid, remove dead copper, pour order 4): 0,0 3600,0 3600,2500 0,2500

## Keep-outs
Top Layer:
  lines w4: 460,920 473.37,933.37 473.37,942 ; 480,1170 480,1220 ; 615.31,1158.54 615.31,1222.05 ; 1488.54,793.13 1511.87,816.46

## Silkscreen, mask and mechanical layers (free items; w line width, h text height)
Top Overlay:
  text "GPIOL0" at 1560,2250 h100
  text "CLK" at 2745,2240 h100
  text "TXD" at 3295,2240 h100
  text "SCL" at 2080,2230 h100
  text "FT2232HL USB Hi-Speed to dual channel serial UART/GPIO/JTAG/SPI/I2C converter" at 200,2175 h80
  text "GPIOL1" at 1560,2150 h100
  text "SDA" at 2745,2133.33 h100
  text "MOSI" at 2080,2130 h100
  text "RXD" at 3295,2130 h100
  text "GPIOL2" at 1560,2050 h100
  text "MISO" at 2080,2030 h100
  text "CS" at 2745,2026.67 h100
  text "GND" at 3295,2020 h100
  text "GPIOL3" at 1560,1950 h100
  text "CS" at 2080,1930 h100
  text "GND" at 2745,1920 h100
  text "GND" at 1560,1850 h100
  text "GND" at 2080,1830 h100
  text "TXLED" at 1950,1670 h100
  text "B" at 2230,1455 h200
  text "RXLED" at 1960,1380 h100
  text "TDI" at 2700,1190 h100 r90
  text "TCK" at 3215,1179.49 h100 r90
  text "TDO" at 2595,1176.85 h100 r90
  text "TMC" at 3010,1176.88 h100 r90
  text "GND" at 3105,1176.85 h100 r90
  text "+3V3" at 2510,1161.03 h100 r90
  text "A" at 2230,910 h200
  text "SCL" at 2090,570 h100
  text "CLK" at 2750,570 h100
  text "GPIOL0" at 1565,565 h100
  text "TXD" at 3295,565 h100
  text "MOSI" at 2090,470 h100
  text "GPIOL1" at 1565,465 h100
  text "SDA" at 2750,463.33 h100
  text "RXD" at 3295,455 h100
  text "MISO" at 2090,370 h100
  text "GPIOL2" at 1565,365 h100
  text "CS" at 2750,356.67 h100
  text "GND" at 3295,345 h100
  text "CS" at 2090,270 h100
  text "GPIOL3" at 1565,265 h100
  text "GND" at 2750,250 h100
  text "GND" at 2090,170 h100
  text "GND" at 1565,165 h100
  text "RXLED" at 1180,30 h100 r90
  text "TXLED" at 1280,30 h100 r90